# EAGLE board AvrProgrammerAll2 (EAGLE 4.11)
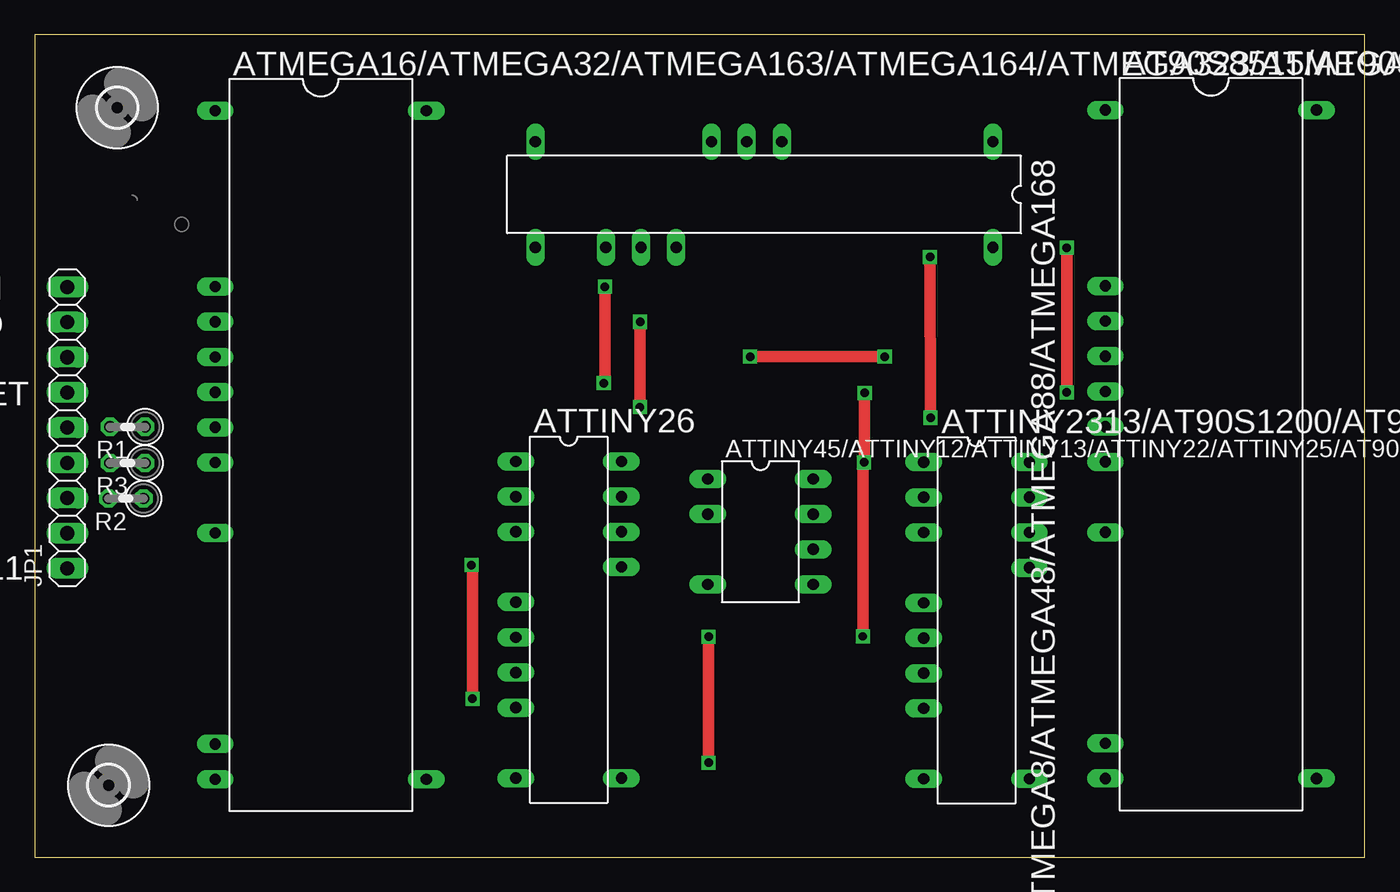
[diagram p0: board, top side]
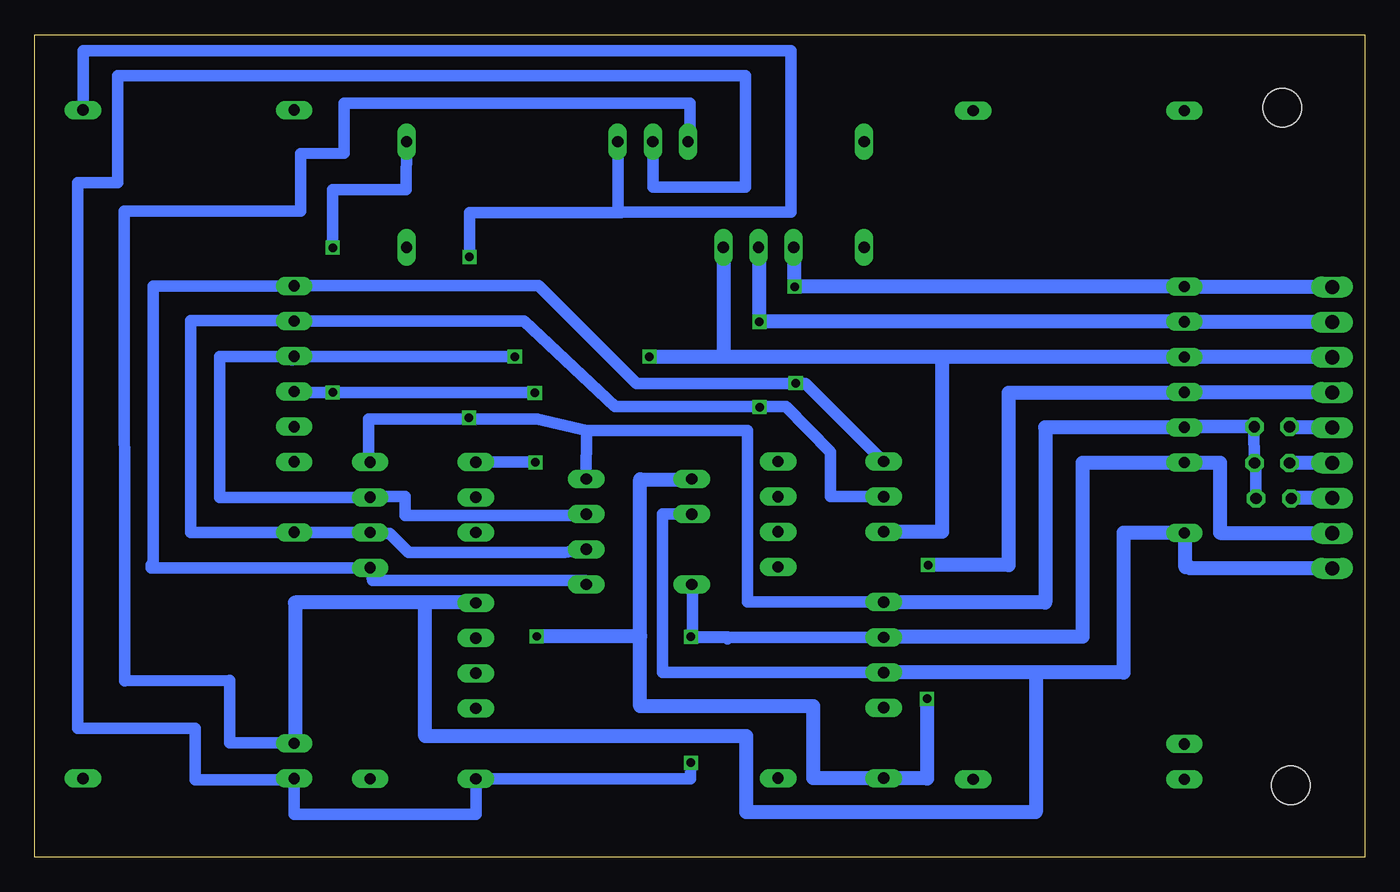
[diagram p1: board, bottom side, seen from below]

Size 96 x 59.39 mm. Coordinates in mm from the lower left corner, seen from the top.
Outline: 0,0 96,0 96,59.39 0,59.39 0,0
Copper layers (1*16): Top 0.035mm / dielectric 1.5mm / Bottom 0.035mm
Design rules "default": minimum track width 10mil, minimum drill 24mil, track to track 8mil, track to pad 8mil, pad to pad 8mil, via to via 8mil, smd to smd 8mil, copper to edge 40mil, drill to drill 8mil, minimum pad ring 10mil, minimum via ring 8mil, stop-mask expansion 4mil, vias tented up to drill 0mil, thermal gap 10mil

## Footprints (pad centres in the part's own frame; a part is rotated, then mirrored left to right if it is on the bottom)
DIL28-3 = drill 0.813 long: 1 -16.51,-3.81; 7 -1.27,-3.81; 8 1.27,-3.81; 9 3.81,-3.81; 14 16.51,-3.81; 15 16.51,3.81; 17 11.43,3.81; 18 8.89,3.81; 19 6.35,3.81; 28 -16.51,3.81
DIL40 = drill 0.813 long: 1 -24.13,-7.62; 6 -11.43,-7.62; 7 -8.89,-7.62; 8 -6.35,-7.62; 9 -3.81,-7.62; 10 -1.27,-7.62; 11 1.27,-7.62; 13 6.35,-7.62; 19 21.59,-7.62; 20 24.13,-7.62; 21 24.13,7.62; 40 -24.13,7.62
DIL20 = drill 0.813 long: 1 -11.43,-3.81; 2 -8.89,-3.81; 3 -6.35,-3.81; 5 -1.27,-3.81; 6 1.27,-3.81; 7 3.81,-3.81; 8 6.35,-3.81; 10 11.43,-3.81; 11 11.43,3.81; 17 -3.81,3.81; 18 -6.35,3.81; 19 -8.89,3.81; 20 -11.43,3.81
DIL08 = drill 0.813 long: 1 -3.81,-3.81; 2 -1.27,-3.81; 4 3.81,-3.81; 5 3.81,3.81; 6 1.27,3.81; 7 -1.27,3.81; 8 -3.81,3.81
1X09 = drill 1.016 long: 1 -10.16,0; 2 -7.62,0; 3 -5.08,0; 4 -2.54,0; 5 0,0; 6 2.54,0; 7 5.08,0; 8 7.62,0; 9 10.16,0
0207/2V = drill 0.813 octagon: 1 -1.27,0; 2 1.27,0
2,8 = hole 2.8: 0,0

## Placement (x,y rotation side)
AT90S2333/AT90S4433/ATMEGA8/ATMEGA48/ATMEGA88/ATMEGA168  IC6  [DIL28-3]  52.65,47.85 180 top
AT90S8515/AT90S4414/ATMEGA161/ATMEGA162/ATMEGA8515  IC4  [DIL40]  84.89,29.82 270 top
ATMEGA16/ATMEGA32/ATMEGA163/ATMEGA164/ATMEGA323/ATMEGA324/ATMEGA644ATMEGA8535/AT90S4434/AT8535  IC5  [DIL40]  20.65,29.77 270 top
ATTINY26  IC2  [DIL20]  38.54,17.15 270 top
ATTINY45/ATTINY12/ATTINY13/ATTINY22/ATTINY25/AT90S2323/ATTINY85/AT90S2343  IC1  [DIL08]  52.38,23.51 270 top
ATTINY2313/AT90S1200/AT90S2313  IC3  [DIL20]  67.98,17.1 270 top
JP1  [1X09]  2.36,31.02 90 top
R1  [0207/2V]  6.7,31.08 180 top
R2  [0207/2V]  6.58,25.9 180 top
R3  [0207/2V]  6.7,28.46 180 top
U$1  [2,8]  5.34,5.2 0 top
U$2  [LOGO]  3.21,45.2 0 top
U$3  [2,8]  5.96,54.11 0 top

## Library data of the parts
AT90S2333/AT90S4433/ATMEGA8/ATMEGA48/ATMEGA88/ATMEGA168 AT90S8515/AT90S4414/ATMEGA161/ATMEGA162/ATMEGA8515 ATMEGA16/ATMEGA32/ATMEGA163/ATMEGA164/ATMEGA323/ATMEGA324/ATMEGA644ATMEGA8535/AT90S4434/AT8535 ATTINY26 ATTINY45/ATTINY12/ATTINY13/ATTINY22/ATTINY25/AT90S2323/ATTINY85/AT90S2343 ATTINY2313/AT90S1200/AT90S2313 = Avr-min
JP1 = pinhead
R1-R3 = rcl
U$1 U$3 = holes
U$2 = atmel

## Nets
GND: AT90S2333/AT90S4433/ATMEGA8/ATMEGA48/ATMEGA88/ATMEGA168.8 AT90S8515/AT90S4414/ATMEGA161/ATMEGA162/ATMEGA8515.20 ATMEGA16/ATMEGA32/ATMEGA163/ATMEGA164/ATMEGA323/ATMEGA324/ATMEGA644ATMEGA8535/AT90S4434/AT8535.11 ATTINY26.6 ATTINY45/ATTINY12/ATTINY13/ATTINY22/ATTINY25/AT90S2323/ATTINY85/AT90S2343.4 ATTINY2313/AT90S1200/AT90S2313.10 JP1.2
MISO: AT90S2333/AT90S4433/ATMEGA8/ATMEGA48/ATMEGA88/ATMEGA168.18 AT90S8515/AT90S4414/ATMEGA161/ATMEGA162/ATMEGA8515.7 ATMEGA16/ATMEGA32/ATMEGA163/ATMEGA164/ATMEGA323/ATMEGA324/ATMEGA644ATMEGA8535/AT90S4434/AT8535.7 ATTINY26.2 ATTINY45/ATTINY12/ATTINY13/ATTINY22/ATTINY25/AT90S2323/ATTINY85/AT90S2343.6 ATTINY2313/AT90S1200/AT90S2313.18 JP1.8
MOSI: AT90S2333/AT90S4433/ATMEGA8/ATMEGA48/ATMEGA88/ATMEGA168.17 AT90S8515/AT90S4414/ATMEGA161/ATMEGA162/ATMEGA8515.6 ATMEGA16/ATMEGA32/ATMEGA163/ATMEGA164/ATMEGA323/ATMEGA324/ATMEGA644ATMEGA8535/AT90S4434/AT8535.6 ATTINY26.1 ATTINY45/ATTINY12/ATTINY13/ATTINY22/ATTINY25/AT90S2323/ATTINY85/AT90S2343.5 ATTINY2313/AT90S1200/AT90S2313.17 JP1.9
N$1: JP1.5 R1.2
N$2: JP1.3 R2.2
N$3: JP1.4 R3.2
RESET: AT90S2333/AT90S4433/ATMEGA8/ATMEGA48/ATMEGA88/ATMEGA168.1 AT90S8515/AT90S4414/ATMEGA161/ATMEGA162/ATMEGA8515.9 ATMEGA16/ATMEGA32/ATMEGA163/ATMEGA164/ATMEGA323/ATMEGA324/ATMEGA644ATMEGA8535/AT90S4434/AT8535.9 ATTINY26.10 ATTINY45/ATTINY12/ATTINY13/ATTINY22/ATTINY25/AT90S2323/ATTINY85/AT90S2343.1 ATTINY2313/AT90S1200/AT90S2313.1 JP1.6
SCK: AT90S2333/AT90S4433/ATMEGA8/ATMEGA48/ATMEGA88/ATMEGA168.19 AT90S8515/AT90S4414/ATMEGA161/ATMEGA162/ATMEGA8515.8 ATMEGA16/ATMEGA32/ATMEGA163/ATMEGA164/ATMEGA323/ATMEGA324/ATMEGA644ATMEGA8535/AT90S4434/AT8535.8 ATTINY26.3 ATTINY45/ATTINY12/ATTINY13/ATTINY22/ATTINY25/AT90S2323/ATTINY85/AT90S2343.7 ATTINY2313/AT90S1200/AT90S2313.19 JP1.7
VCC: AT90S2333/AT90S4433/ATMEGA8/ATMEGA48/ATMEGA88/ATMEGA168.7 AT90S8515/AT90S4414/ATMEGA161/ATMEGA162/ATMEGA8515.40 ATMEGA16/ATMEGA32/ATMEGA163/ATMEGA164/ATMEGA323/ATMEGA324/ATMEGA644ATMEGA8535/AT90S4434/AT8535.10 ATTINY26.5 ATTINY45/ATTINY12/ATTINY13/ATTINY22/ATTINY25/AT90S2323/ATTINY85/AT90S2343.8 ATTINY2313/AT90S1200/AT90S2313.20 R1.1 R2.1 R3.1
XTAL1: AT90S2333/AT90S4433/ATMEGA8/ATMEGA48/ATMEGA88/ATMEGA168.9 AT90S8515/AT90S4414/ATMEGA161/ATMEGA162/ATMEGA8515.19 ATMEGA16/ATMEGA32/ATMEGA163/ATMEGA164/ATMEGA323/ATMEGA324/ATMEGA644ATMEGA8535/AT90S4434/AT8535.13 ATTINY26.7 ATTINY45/ATTINY12/ATTINY13/ATTINY22/ATTINY25/AT90S2323/ATTINY85/AT90S2343.2 ATTINY2313/AT90S1200/AT90S2313.5 JP1.1

## Tracks (layer width: path | path; a pad name or v marks a point on that pad's centre or on a via)
GND  (via drill 0.61)
  Top 0.813: v48.64,6.84 v48.64,15.92
  Bottom 0.813: 34.48,15.88 34.48,15.81 | 34.48,15.88 ATTINY26.6 45.98,15.88 | 34.48,15.92 34.48,15.88 | ATTINY45/ATTINY12/ATTINY13/ATTINY22/ATTINY25/AT90S2323/ATTINY85/AT90S2343.4 48.53,19.68 48.53,15.88 45.98,15.88 | 77.28,5.59 77.28,3.1 64.15,3.1 64.15,5.33 64.17,5.33 ATTINY2313/AT90S1200/AT90S2313.10 48.67,5.67 v48.64,6.84 | 77.28,5.59 AT90S8515/AT90S4414/ATMEGA161/ATMEGA162/ATMEGA8515.20 | 45.98,15.88 45.98,15.79 | v48.64,15.92 45.98,15.92 45.98,15.88 | AT90S2333/AT90S4433/ATMEGA8/ATMEGA48/ATMEGA88/ATMEGA168.8 51.38,48.39 44.71,48.39 44.71,56.41 90,56.41 90,48.7 92.88,48.7 92.88,9.31 84.43,9.31 84.43,5.59 77.28,5.59
  Bottom 1.016: 34.48,15.92 20.36,15.92 20.36,28.5 ATMEGA16/ATMEGA32/ATMEGA163/ATMEGA164/ATMEGA323/ATMEGA324/ATMEGA644ATMEGA8535/AT90S4434/AT8535.11 10.45,28.5 10.45,23.43 2.35,23.43 JP1.2
MISO  (via drill 0.61)
  Top 0.813: v43.7,38.66 v43.7,32.5 v43.69,32.5
  Bottom 0.813: ATMEGA16/ATMEGA32/ATMEGA163/ATMEGA164/ATMEGA323/ATMEGA324/ATMEGA644ATMEGA8535/AT90S4434/AT8535.7 13.13,38.67 | 43.7,44.04 AT90S2333/AT90S4433/ATMEGA8/ATMEGA48/ATMEGA88/ATMEGA168.18 | ATTINY26.2 38.57,26.04 38.57,29.27 41.77,32.54 43.73,32.54 | 43.73,32.54 54.1,32.54 60.7,38.69 AT90S8515/AT90S4414/ATMEGA161/ATMEGA162/ATMEGA8515.7 76.98,38.71 76.98,38.75 84.75,38.75 84.75,23.45 ATTINY2313/AT90S1200/AT90S2313.18 71.76,23.43 71.76,23.37 70.39,23.37 69.02,22 57.77,22 ATTINY45/ATTINY12/ATTINY13/ATTINY22/ATTINY25/AT90S2323/ATTINY85/AT90S2343.6 | 43.73,32.54 43.73,32.56 | v43.69,32.5 43.73,32.54
  Bottom 1.016: 43.7,44.04 v43.7,38.66 ATMEGA16/ATMEGA32/ATMEGA163/ATMEGA164/ATMEGA323/ATMEGA324/ATMEGA644ATMEGA8535/AT90S4434/AT8535.7 13.04,38.66 13.04,38.64 | JP1.8 13.04,38.64 | 13.04,38.64 13.04,38.53
MOSI  (via drill 0.61)
  Top 0.813: v41.16,41.2 41.16,34.23 v41.07,34.23
  Bottom 0.813: ATMEGA16/ATMEGA32/ATMEGA163/ATMEGA164/ATMEGA323/ATMEGA324/ATMEGA644ATMEGA8535/AT90S4434/AT8535.6 12.97,41.2 | 41.16,44.04 AT90S2333/AT90S4433/ATMEGA8/ATMEGA48/ATMEGA88/ATMEGA168.17 41.22,44.24 41.2,44.24 | 77.1,41.25 77.1,41.34 | 77.1,41.25 AT90S8515/AT90S4414/ATMEGA161/ATMEGA162/ATMEGA8515.6 77.27,41.28 59.64,41.28 52.57,34.22 41.07,34.22 | 77.1,41.25 77.1,41.22 87.46,41.22 87.46,21.1 87.58,21.1 87.58,20.91 ATTINY2313/AT90S1200/AT90S2313.17 71.76,20.89 71.63,20 56.28,20 ATTINY45/ATTINY12/ATTINY13/ATTINY22/ATTINY25/AT90S2323/ATTINY85/AT90S2343.5 | ATTINY26.1 40.37,34.22 41.07,34.22 | 41.07,34.22 v41.07,34.23 41.07,34.3
  Bottom 1.016: 41.16,44.04 v41.16,41.2 ATMEGA16/ATMEGA32/ATMEGA163/ATMEGA164/ATMEGA323/ATMEGA324/ATMEGA644ATMEGA8535/AT90S4434/AT8535.6 13.02,41.18 JP1.9
N$1
  Bottom 1.016: R1.2 5.35,31.08 5.35,31.02 JP1.5
N$2
  Bottom 1.016: 5.29,25.88 5.29,25.9 | 5.29,25.9 R2.2 | JP1.3 5.29,25.94 5.29,25.9
N$3
  Bottom 1.016: 5.46,28.48 5.46,28.46 R3.2 | JP1.4 5.46,28.48 | 5.46,28.48 5.46,28.5
RESET  (via drill 0.61)
  Top 0.813: v31.52,21.1 31.6,21.1 v31.6,11.45 | v74.49,33.56 v74.49,44 | v59.77,15.95 59.77,28.51 v59.86,28.51 59.9,28.51 | 59.9,28.51 59.9,28.43 | 59.9,28.51 v59.9,33.52
  Bottom 0.813: ATMEGA16/ATMEGA32/ATMEGA163/ATMEGA164/ATMEGA323/ATMEGA324/ATMEGA644ATMEGA8535/AT90S4434/AT8535.9 13.05,33.52 13.12,33.52 | 34.74,5.69 34.73,5.69 ATTINY26.10 | 48.83,27.28 48.35,27.28 ATTINY45/ATTINY12/ATTINY13/ATTINY22/ATTINY25/AT90S2323/ATTINY85/AT90S2343.1 | AT90S2333/AT90S4433/ATMEGA8/ATMEGA48/ATMEGA88/ATMEGA168.1 69.18,48.18 74.49,48.18 74.49,43.98 v74.49,44 | AT90S8515/AT90S4414/ATMEGA161/ATMEGA162/ATMEGA8515.9 77.03,33.63 77.03,33.56 v74.49,33.56 59.9,33.56 v59.9,33.52 | ATTINY2313/AT90S1200/AT90S2313.1 59.86,28.53 v59.86,28.51 | 52.31,15.95 52.25,15.95
  Bottom 1.016: v31.52,21.1 25.72,21.1 25.72,33.52 13.12,33.52 13.12,33.56 | v31.6,11.45 31.6,5.69 34.73,5.69 | ATTINY26.10 39.81,5.72 39.81,10.9 52.31,10.9 52.31,15.95 | 52.31,15.95 52.31,27.28 48.83,27.28 | 52.31,15.95 v59.77,15.95 | JP1.6 13.12,33.56 | 13.12,33.56 13.12,33.73
SCK  (via drill 0.61)
  Top 0.813: v51.64,36.14 v61.35,36.14
  Bottom 0.813: ATMEGA16/ATMEGA32/ATMEGA163/ATMEGA164/ATMEGA323/ATMEGA324/ATMEGA644ATMEGA8535/AT90S4434/AT8535.8 12.93,36.12 12.81,36.13 | 46.24,44.14 46.24,44.04 AT90S2333/AT90S4433/ATMEGA8/ATMEGA48/ATMEGA88/ATMEGA168.19 | 77.1,36.16 77.1,36.17 AT90S8515/AT90S4414/ATMEGA161/ATMEGA162/ATMEGA8515.8 | 77.4,36.16 82.63,36.16 82.63,25.99 ATTINY2313/AT90S1200/AT90S2313.19 71.78,26.06 69.26,26.06 69.26,24.7 59.8,24.7 59.8,24.69 56.16,24.69 56.16,24.78 ATTINY45/ATTINY12/ATTINY13/ATTINY22/ATTINY25/AT90S2323/ATTINY85/AT90S2343.7 | 77.4,36.16 77.1,36.16 | 77.1,36.16 77.1,36.05 | 51.64,36.12 v51.64,36.14 | 77.35,36.14 77.4,36.16 | v61.35,36.14 77.35,36.14 | 77.35,36.14 77.4,35.91
  Bottom 1.016: ATMEGA16/ATMEGA32/ATMEGA163/ATMEGA164/ATMEGA323/ATMEGA324/ATMEGA644ATMEGA8535/AT90S4434/AT8535.8 30.51,36.12 | 30.51,36.12 46.24,36.12 | 46.24,36.12 46.24,44.04 | ATTINY26.3 30.51,23.5 30.51,36.12 | 46.24,36.12 51.64,36.12 | 12.92,36.1 12.92,36.12 12.93,36.12 | JP1.7 12.92,36.1 | 12.92,36.1 12.92,35.95
VCC  (via drill 0.61)
  Top 0.813: v64.66,31.73 v64.63,43.33
  Bottom 0.813: R2.1 7.87,28.44 R3.1 8.01,31.03 R1.1 | 13.16,31.1 ATMEGA16/ATMEGA32/ATMEGA163/ATMEGA164/ATMEGA323/ATMEGA324/ATMEGA644ATMEGA8535/AT90S4434/AT8535.10 | 34.84,18.42 34.84,18.39 34.84,18.28 | 34.84,18.42 ATTINY26.5 | 56.17,30.82 ATTINY45/ATTINY12/ATTINY13/ATTINY22/ATTINY25/AT90S2323/ATTINY85/AT90S2343.8 56.12,27.23 56.19,27.28 | 56.17,30.82 59.73,31.65 | 59.73,31.65 71.91,31.65 71.91,31.55 71.91,28.44 71.87,28.44 ATTINY2313/AT90S1200/AT90S2313.20 | 34.84,18.42 34.84,18.43 44.55,18.43 44.55,30.83 56.14,30.83 56.17,30.82 | AT90S8515/AT90S4414/ATMEGA161/ATMEGA162/ATMEGA8515.40 92.49,53.95 92.49,58.24 41.41,58.24 41.41,46.56 53.67,46.56 | AT90S2333/AT90S4433/ATMEGA8/ATMEGA48/ATMEGA88/ATMEGA168.7 53.91,51.71 | AT90S2333/AT90S4433/ATMEGA8/ATMEGA48/ATMEGA88/ATMEGA168.7 | 53.67,46.56 53.91,46.56 AT90S2333/AT90S4433/ATMEGA8/ATMEGA48/ATMEGA88/ATMEGA168.7 | 59.73,31.65 64.93,31.65 v64.66,31.73 | 53.67,46.56 53.67,46.52 64.63,46.52 v64.63,43.33
  Bottom 1.016: R1.1 13.16,31.1 | ATMEGA16/ATMEGA32/ATMEGA163/ATMEGA164/ATMEGA323/ATMEGA324/ATMEGA644ATMEGA8535/AT90S4434/AT8535.10 23.07,31.04 23.07,18.39 34.84,18.39
XTAL1
  Bottom 0.813: 12.96,23.42 ATMEGA16/ATMEGA32/ATMEGA163/ATMEGA164/ATMEGA323/ATMEGA324/ATMEGA644ATMEGA8535/AT90S4434/AT8535.13 | 12.96,20.93 12.96,20.86 | 34.48,13.34 34.48,13.45 | 34.48,13.34 ATTINY26.7 50.67,13.34 50.67,24.8 48.7,24.8 | 34.48,13.34 | AT90S8515/AT90S4414/ATMEGA161/ATMEGA162/ATMEGA8515.19 77.21,8.23 77.21,8.27 81.92,8.27 81.92,12.78 89.52,12.76 89.55,46.63 76.81,46.63 76.81,50.8 73.67,50.81 73.67,54.43 48.71,54.43 48.71,51.66 AT90S2333/AT90S4433/ATMEGA8/ATMEGA48/ATMEGA88/ATMEGA168.9 | 64.15,18.27 64.17,18.39 ATTINY2313/AT90S1200/AT90S2313.5 67.82,18.37 | 48.7,24.8 48.46,24.9 ATTINY45/ATTINY12/ATTINY13/ATTINY22/ATTINY25/AT90S2323/ATTINY85/AT90S2343.2 | 48.7,24.8 48.7,24.71
  Bottom 1.016: 12.96,23.42 12.96,20.93 12.62,20.93 12.62,20.86 JP1.1 | ATMEGA16/ATMEGA32/ATMEGA163/ATMEGA164/ATMEGA323/ATMEGA324/ATMEGA644ATMEGA8535/AT90S4434/AT8535.13 17.42,23.42 17.42,13.34 23.75,13.34 | 23.75,13.34 34.48,13.34 | 77.21,8.27 77.21,18.39 64.17,18.39 | 67.82,18.37 67.82,8.75 44.63,8.75 44.63,3.25 23.75,3.25 23.75,13.34

## Text on the board
tPlace: MOSI | MISO | SCK | RESET | GND | XTAL1